# EAGLE board Light_Sensor_Layout_v21 (EAGLE 9.7.0)
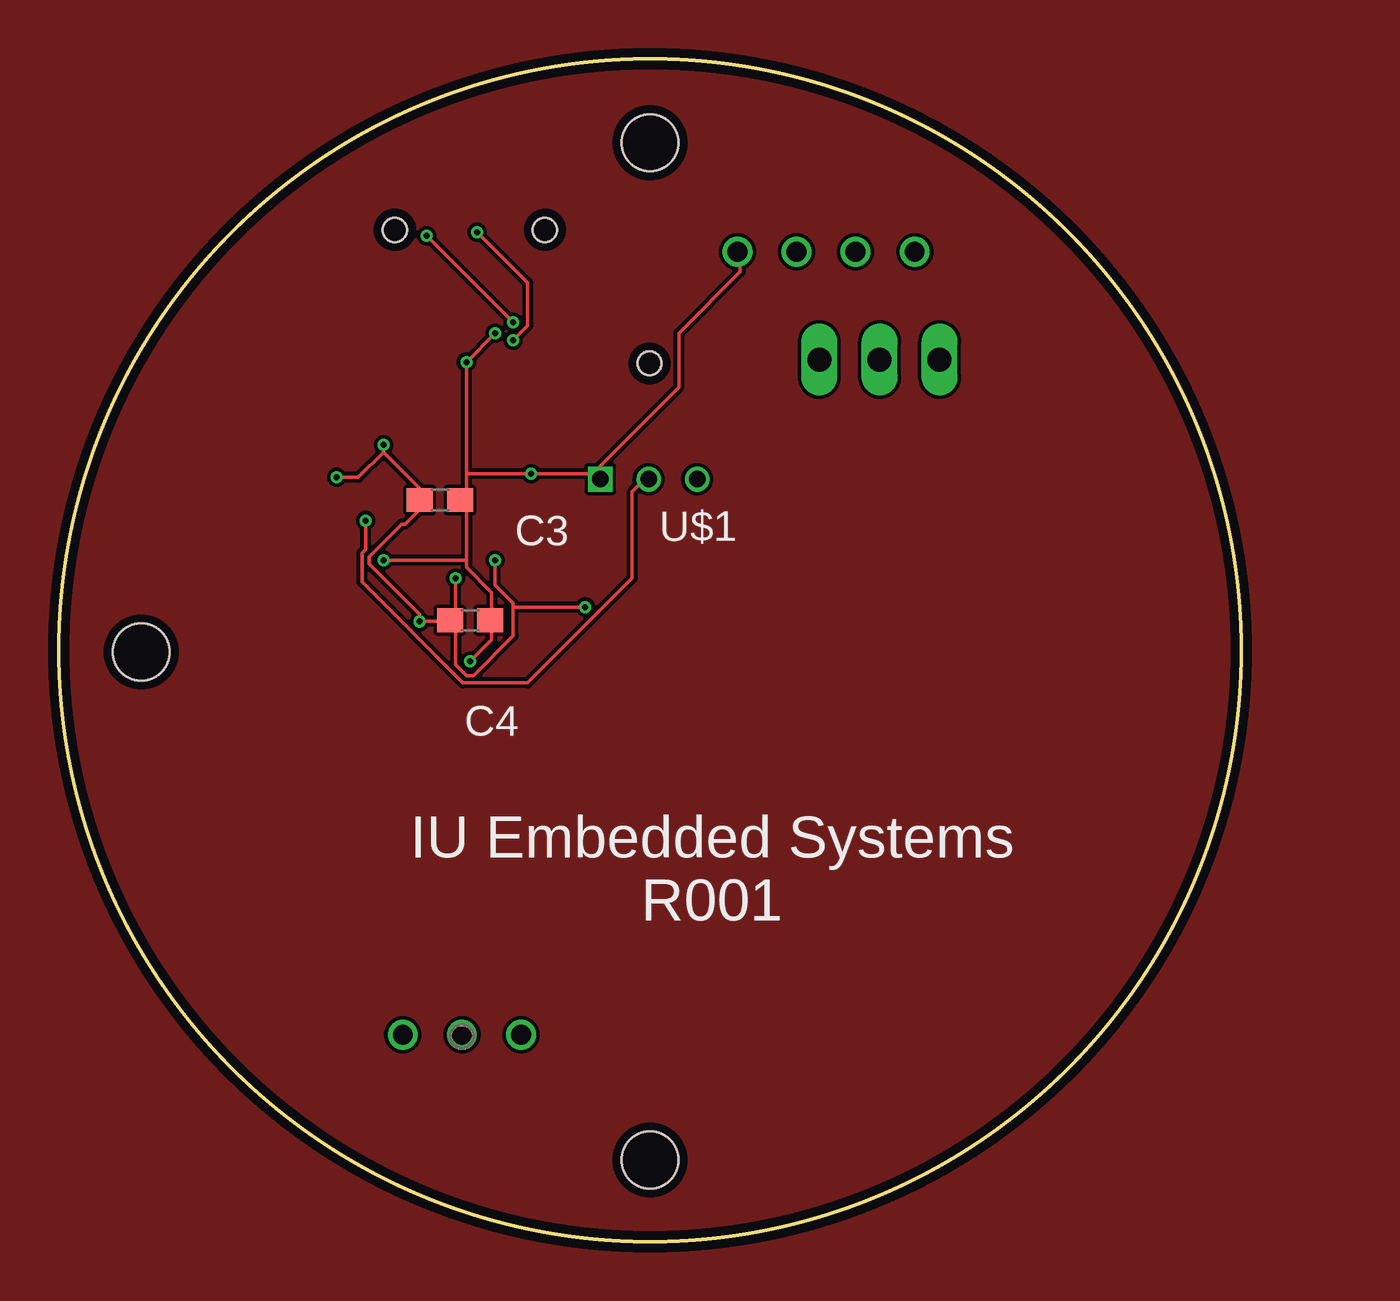
[diagram p0: board, top side]
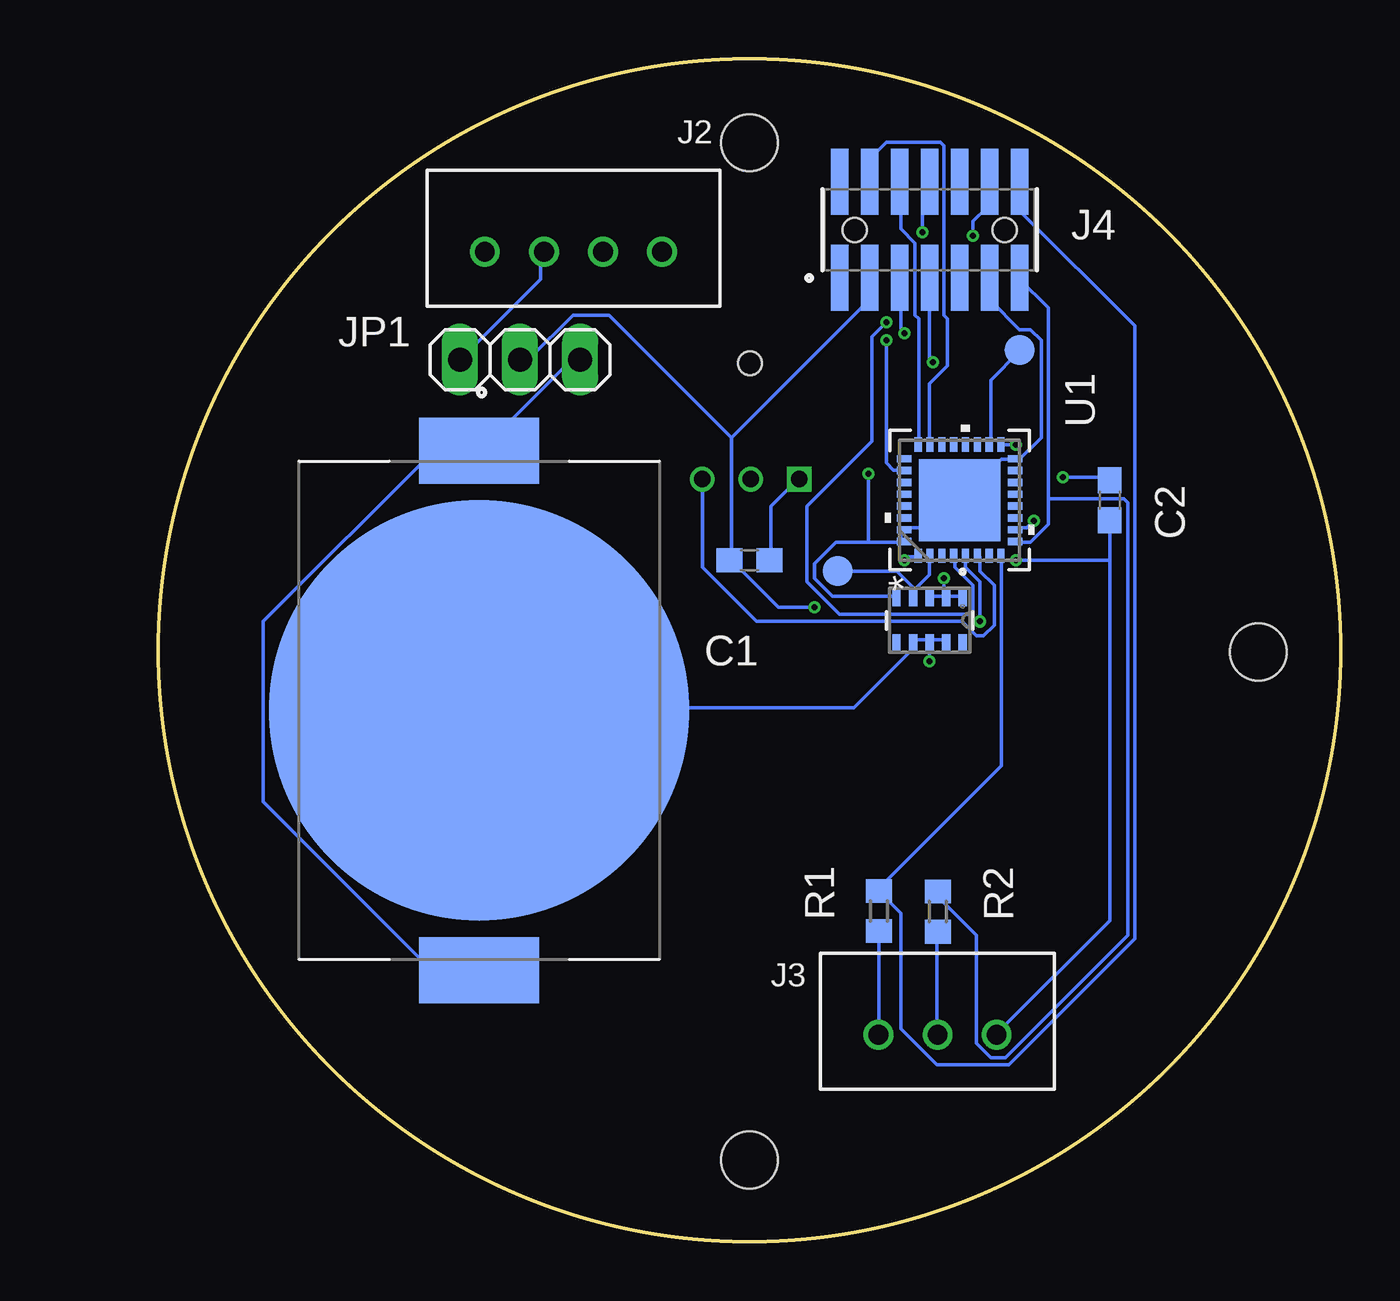
[diagram p1: board, bottom side, seen from below]

Size 50 x 50 mm. Coordinates in mm from the lower left corner, seen from the top.
Outline: circle at 25,25 radius 25
Copper layers (1*16): Top 0.035559375mm / dielectric 1.6mm / Bottom 0.035559375mm
Design rules "oshpark-2layer": minimum track width 6mil, minimum drill 10mil, track to track 6mil, track to pad 6mil, pad to pad 6mil, via to via 6mil, smd to smd 6mil, copper to edge 15mil, drill to drill 6mil, minimum pad ring 5mil, minimum via ring 5mil, stop-mask expansion 2.5mil, vias tented up to drill 0mil, thermal gap 10mil
Holes 2.4 mm at 25,46.46 3.47,24.93 25,3.45
Holes 1 mm at 24.97,37.14

## Footprints (pad centres in the part's own frame; a part is rotated, then mirrored left to right if it is on the bottom)
MPD_BK-912-TR = smd 2.79 x 5.08: 1 -10.985,0; 2 10.985,0 | smd 17.78 x 17.78: 3 0,0
C0603 = smd 1.1 x 1: 1 -0.85,0; 2 0.85,0
B4B-XH-A = drill 0.84: 1 0,0; 2 2.5,0; 3 5,0; 4 7.5,0
B3B-XH-A = drill 0.84: 1 0,0; 2 2.5,0; 3 5,0
SAMTEC_FTSH-107-01-L-DV-A-TR = smd 0.74 x 2.79: 01 -3.81,-2.035; 02 -3.81,2.035; 03 -2.54,-2.035; 04 -2.54,2.035; 05 -1.27,-2.035; 06 -1.27,2.035; 07 0,-2.035; 08 0,2.035; 09 1.27,-2.035; 10 1.27,2.035; 11 2.54,-2.035; 12 2.54,2.035; 13 3.81,-2.035; 14 3.81,2.035 | hole 1.02: -3.175,0; 3.175,0
1X03 = drill 1.016 long: 1 -2.54,0; 2 0,0; 3 2.54,0
R0603 = smd 1 x 1.1: 1 -0.85,0; 2 0.85,0
B1,27 = smd 1.27 x 1.27: TP 0,0
UFQFPN32-5X5MM = smd 0.61 x 0.305: 1 -2.35,1.75; 2 -2.35,1.25; 3 -2.35,0.75; 4 -2.35,0.25; 5 -2.35,-0.25; 6 -2.35,-0.75; 7 -2.35,-1.25; 8 -2.35,-1.75; 17 2.35,-1.75; 18 2.35,-1.25; 19 2.35,-0.75; 20 2.35,-0.25; 21 2.35,0.25; 22 2.35,0.75; 23 2.35,1.25; 24 2.35,1.75 | smd 0.305 x 0.61: 9 -1.75,-2.35; 10 -1.25,-2.35; 11 -0.75,-2.35; 12 -0.25,-2.35; 13 0.25,-2.35; 14 0.75,-2.35; 15 1.25,-2.35; 16 1.75,-2.35; 25 1.75,2.35; 26 1.25,2.35; 27 0.75,2.35; 28 0.25,2.35; 29 -0.25,2.35; 30 -0.75,2.35; 31 -1.25,2.35; 32 -1.75,2.35 | smd 3.454 x 3.454: 33 0,0
TSL237 = drill 0.7 square: P$1 0,0 | drill 0.7: P$2 0,-2.05; P$3 0,-4.1
TG-3541CE_32.7680KXB3_EPS-M = smd 0.711 x 0.356: 1 -0.945,1.4; 2 -0.945,0.7; 3 -0.945,0; 4 -0.945,-0.7; 5 -0.945,-1.4; 6 0.945,-1.4; 7 0.945,-0.7; 8 0.945,0; 9 0.945,0.7; 10 0.945,1.4

## Placement (x,y rotation side)
BT5  BK-912-TR  [MPD_BK-912-TR]  36.43,22.46 270 bottom
C1  0.1uF  [C0603]  25,28.81 0 bottom
C2  0.1uF  [C0603]  9.76,31.35 270 bottom
C3  1uF  [C0603]  16.11,31.35 0 top
C4  0.1uF  [C0603]  17.38,26.27 0 top
J2  B4B-XH-A  [B4B-XH-A]  36.19,41.85 0 bottom
J3  B3B-XH-A  [B3B-XH-A]  19.54,8.74 0 bottom
J4  FTSH-107-01-L-DV-A-TR  [SAMTEC_FTSH-107-01-L-DV-A-TR]  17.38,42.78 0 bottom
JP1  [1X03]  34.7,37.29 0 bottom
R1  200  [R0603]  19.51,13.98 270 bottom
R2  200  [R0603]  17.02,13.95 270 bottom
TP1  TPB1,27  [B1,27]  21.27,28.35 0 bottom
TP2  TPB1,27  [B1,27]  13.57,37.7 0 bottom
U1  STM32L432KX  [UFQFPN32-5X5MM]  16.11,31.35 90 bottom
U$1  TSL237  [TSL237]  22.89,32.24 90 top
XTAL1  TG-3541CE_32.7680KXB3TG-3541CE_32.7680KXB3_EPS-M  [TG-3541CE_32.7680KXB3_EPS-M]  17.38,26.27 270 bottom

## Library data of the parts
BT5 = Embedded_Systems_Components; MANUFACTURER: MPD; PARTREV: H; STANDARD: Manufacturer Recommendations
C1-C4 = rcl; SPICEPREFIX: C
J2 = Connector; CATEGORY: Header; DSECRIPTION: Connector Header Through Hole 4 position 0.098" (2.50mm); MANUFACTURER: JST Sales America Inc.; MPN: B4B-XH-A(LF)(SN); OPERATING_TEMPERATURE: -25 C to 85 C; PART_STATUS: ACTIVE; PITCH: 0.098" (2.50mm); ROHS_COMPLIANCE: ROHS3 Compliant; SERIES: XH; SUB_CATEGORY: Rectangular Connectors; TYPE: Header, Male Pin, Board to Cable/Wire, Through Hole
J3 = Connector; CATEGORY: Header; DESCRIPTION: Connector Header Through Hole 3 position 0.098" (2.50mm); MANUFACTURER: JST Sales America Inc.; MPN: B3B-XH-A(LF)(SN); PART_STATUS: ACTIVE; PITCH: 0.098" (2.50mm); ROHS_COMPLIANCE: ROHS3 Compliant; SERIES: XH; SUB_CATEGORY: Rectangular Connectors; TYPE: Header, Male Pin, Board to Cable/Wire, Through Hole
J4 = Embedded_Systems_Components; MANUFACTURER: Samtec; PARTREV: R; STANDARD: Manufacturer Recommendations
JP1 = pinhead
R1 R2 = rcl; SPICEPREFIX: R
TP1 TP2 = testpad
U1 = Embedded_Systems_Components; MANUFACTURER_PART_NUMBER: STM32L432KX; VENDOR: STMicroelectronics
U$1 = Embedded_Systems_Components
XTAL1 = Embedded_Systems_Components; COPYRIGHT: Copyright (C) 2023 Ultra Librarian. All rights reserved.; MANUFACTURER_PART_NUMBER: TG-3541CE 32.7680KXB3; MFR_NAME: Epson

## Nets
CLKOUT: TP2.TP U1.18
GND: BT5.3 C1.2 C2.2 C3.2 C4.2 J2.4 J3.3 J4.05 J4.07 J4.11 U1.16 U1.31 U1.32 U1.33 U$1.P$1 XTAL1.5 XTAL1.7 XTAL1.8 XTAL1.9
N$1: BT5.1 BT5.2 JP1.3
N$2: J2.2 JP1.1
N$5: J3.1 R1.2
N$6: J3.2 R2.2
NRST: J4.12 U1.4
OSC: TP1.TP U1.2 XTAL1.4
RX: J4.13 R2.1 U1.9
SWCLK: J4.06 U1.24
SWDIO: J4.04 U1.23
SWO: J4.08 U1.26
TSL237_EN: U1.10 U$1.P$2
TSL237_IN: U1.6 U$1.P$3
TX: J4.14 R1.1 U1.8
VCC: C1.1 C2.1 C3.1 C4.1 J4.03 JP1.2 U1.1 U1.5 U1.17 XTAL1.1 XTAL1.2 XTAL1.3

## Tracks (layer width: path | path; a pad name or v marks a point on that pad's centre or on a via)
CLKOUT
  Bottom 0.152: U1.18 14.79,33.84 14.79,36.43 13.57,37.65 TP2.TP
GND  (via drill 0.25)
  Top 0.152: 17.23,28.81 17.23,31.1 17.07,31.25 C3.2 17.07,31.4 17.23,31.55 17.23,32.47 | 17.23,28.81 17.23,28.5 18.29,27.44 18.29,26.37 C4.2 18.29,26.22 18.29,25.46 v17.38,24.54 | 17.23,32.47 v17.23,37.19 v18.45,38.41 | 22.87,32.47 22.87,32.31 U$1.P$1 22.87,32.47 | 22.87,32.47 22.87,32.77 26.22,36.12 26.22,38.41 28.81,41 28.81,41.76 J2.4 | 22.87,32.47 v19.97,32.47 17.23,32.47 | 17.23,28.81 v13.72,28.81
  Bottom 0.152: 9.76,28.81 9.76,13.57 14.48,8.85 J3.3 | 9.76,28.81 C2.2 | 19.97,29.57 18.6,29.57 U1.32 18.6,29.72 18.6,30.03 U1.31 18.45,30.18 17.23,30.18 16.16,31.25 U1.33 16.01,31.4 14.33,33.08 13.88,33.08 U1.16 13.72,33.08 13.57,33.08 12.66,33.99 12.66,38.11 13.11,38.56 13.57,38.56 14.79,39.78 14.79,40.7 J4.11 | 19.97,29.57 21.34,29.57 22.26,28.66 22.26,28.05 21.5,27.29 18.9,27.29 XTAL1.5 | J4.07 17.38,37.34 v17.23,37.19 | v18.45,38.41 18.6,38.56 18.6,40.7 J4.05 | C1.2 24.09,28.81 24.09,31.1 23.02,32.16 U$1.P$1 | v19.97,32.47 19.97,29.57 | v13.72,28.81 9.76,28.81 | 17.38,25.46 16.77,25.46 XTAL1.9 | 17.38,25.46 17.99,25.46 XTAL1.7 18.14,25.3 18.14,25 20.58,22.56 36.43,22.56 BT5.3 | 17.38,25.46 XTAL1.8 v17.38,24.54
N$1
  Bottom 0.152: 36.43,33.38 32.62,37.19 32.16,37.19 JP1.3 | 36.43,33.38 38.41,33.38 45.57,26.22 45.57,18.6 38.56,11.59 36.43,11.59 BT5.2 | 36.43,33.38 BT5.1
N$2
  Bottom 0.152: JP1.1 33.84,40.7 33.84,41.76 J2.2
N$3
  pour Top: -4.13,-4.13 59.21,-4.13 59.21,54.13 -4.13,54.13
N$5
  Bottom 0.152: R1.2 19.51,8.85 J3.1
N$6
  Bottom 0.152: R2.2 17.07,12.96 17.07,8.85 J3.2
NRST  (via drill 0.25)
  Top 0.152: v15.55,42.53 v19.21,38.87
  Bottom 0.152: v19.21,38.87 19.82,38.26 19.82,33.84 22.56,31.1 22.56,27.9 21.19,26.52 15.7,26.52 15.55,26.68 15.55,27.74 16.31,28.5 16.31,28.96 U1.4 | v15.55,42.53 15.55,43.14 14.94,43.75 14.94,44.81 J4.12
OSC
  Bottom 0.152: 17.99,27.59 17.38,28.2 17.38,28.96 U1.2 | 17.99,27.59 17.99,27.29 XTAL1.4 | TP1.TP 18.75,28.35 17.99,27.59
RX
  Bottom 0.152: 12.35,31.4 12.35,39.48 13.57,40.7 J4.13 | 12.35,31.4 12.35,30.33 13.11,29.57 13.72,29.57 U1.9 | 12.35,31.4 9.15,31.4 9,31.25 9,12.96 14.18,7.78 14.79,7.78 15.4,8.39 15.4,12.96 16.92,14.48 16.92,14.79 R2.1
SWCLK
  Bottom 0.152: U1.24 17.84,33.84 17.84,39.02 17.99,39.17 17.99,42.22 18.6,42.83 18.6,44.81 J4.06
SWDIO
  Bottom 0.152: U1.23 17.38,33.84 17.38,36.28 16.62,37.04 16.62,39.02 16.77,39.17 16.77,46.34 16.92,46.49 19.21,46.49 19.82,45.88 19.82,44.96 J4.04
SWO  (via drill 0.25)
  Top 0.152: v19.21,38.11 19.82,38.72 19.82,40.55 v17.68,42.68
  Bottom 0.152: v19.21,38.11 19.21,32.92 18.9,32.62 18.6,32.62 U1.26 | v17.68,42.68 17.68,44.51 J4.08
TSL237_EN  (via drill 0.25)
  Top 0.152: v12.96,30.49 12.96,29.27 12.81,29.12 12.81,27.9 17.07,23.63 19.82,23.63 24.24,28.05 24.24,31.71 24.85,32.31 U$1.P$2
  Bottom 0.152: v12.96,30.49 13.27,30.18 13.72,30.18 U1.10
TSL237_IN
  Bottom 0.152: U1.6 15.25,28.96 15.25,28.35 14.64,27.74 14.64,26.07 15.09,25.61 15.4,25.61 16.01,26.22 24.7,26.22 26.98,28.5 26.98,32.16 U$1.P$3
TX
  Bottom 0.152: U1.8 14.33,28.96 14.33,20.12 19.51,14.94 R1.1 19.51,14.79 18.6,13.88 18.6,9 17.07,7.47 14.03,7.47 8.69,12.81 8.69,38.72 13.57,43.59 J4.14
VCC  (via drill 0.25)
  Top 0.152: C4.1 16.47,26.22 v15.25,26.22 15.25,26.52 13.11,28.66 13.11,28.96 14.48,30.33 14.64,30.33 15.25,30.94 15.25,31.25 C3.1 15.25,31.4 15.25,31.86 13.72,33.38 | v18.45,28.81 18.45,27.74 19.21,26.98 19.21,26.83 | 19.21,26.83 19.21,25.61 17.53,23.93 17.23,23.93 16.77,24.39 16.77,26.07 16.62,26.22 C4.1 | v16.77,28.05 16.77,26.52 16.62,26.37 C4.1 | 13.72,33.38 v13.72,33.69 | v11.74,32.31 12.66,32.31 13.72,33.38 | v22.26,26.83 19.21,26.83
  Bottom 0.152: XTAL1.1 16.01,27.29 16.62,27.29 XTAL1.2 16.77,27.29 | 16.77,27.29 17.38,27.29 XTAL1.3 | v15.25,26.22 15.25,27.9 15.86,28.5 15.86,28.96 U1.5 | v18.45,28.81 18.29,28.96 17.99,28.96 U1.1 | v16.77,28.05 16.77,27.29 | v13.72,33.69 14.33,33.69 U1.17 | v11.74,32.31 9.76,32.31 C2.1 | 25.76,33.99 25.76,28.81 | 25.76,33.99 19.97,39.78 19.97,40.7 J4.03 | 25.76,33.99 30.94,39.17 32.47,39.17 34.3,37.34 34.6,37.34 JP1.2 | v22.26,26.83 23.78,26.83 25.76,28.81 | 25.76,28.81 C1.1

## Text on the board
tPlace: IU Embedded Systems / R001